# EAGLE board Panelizado_completo (EAGLE 9.6.2)
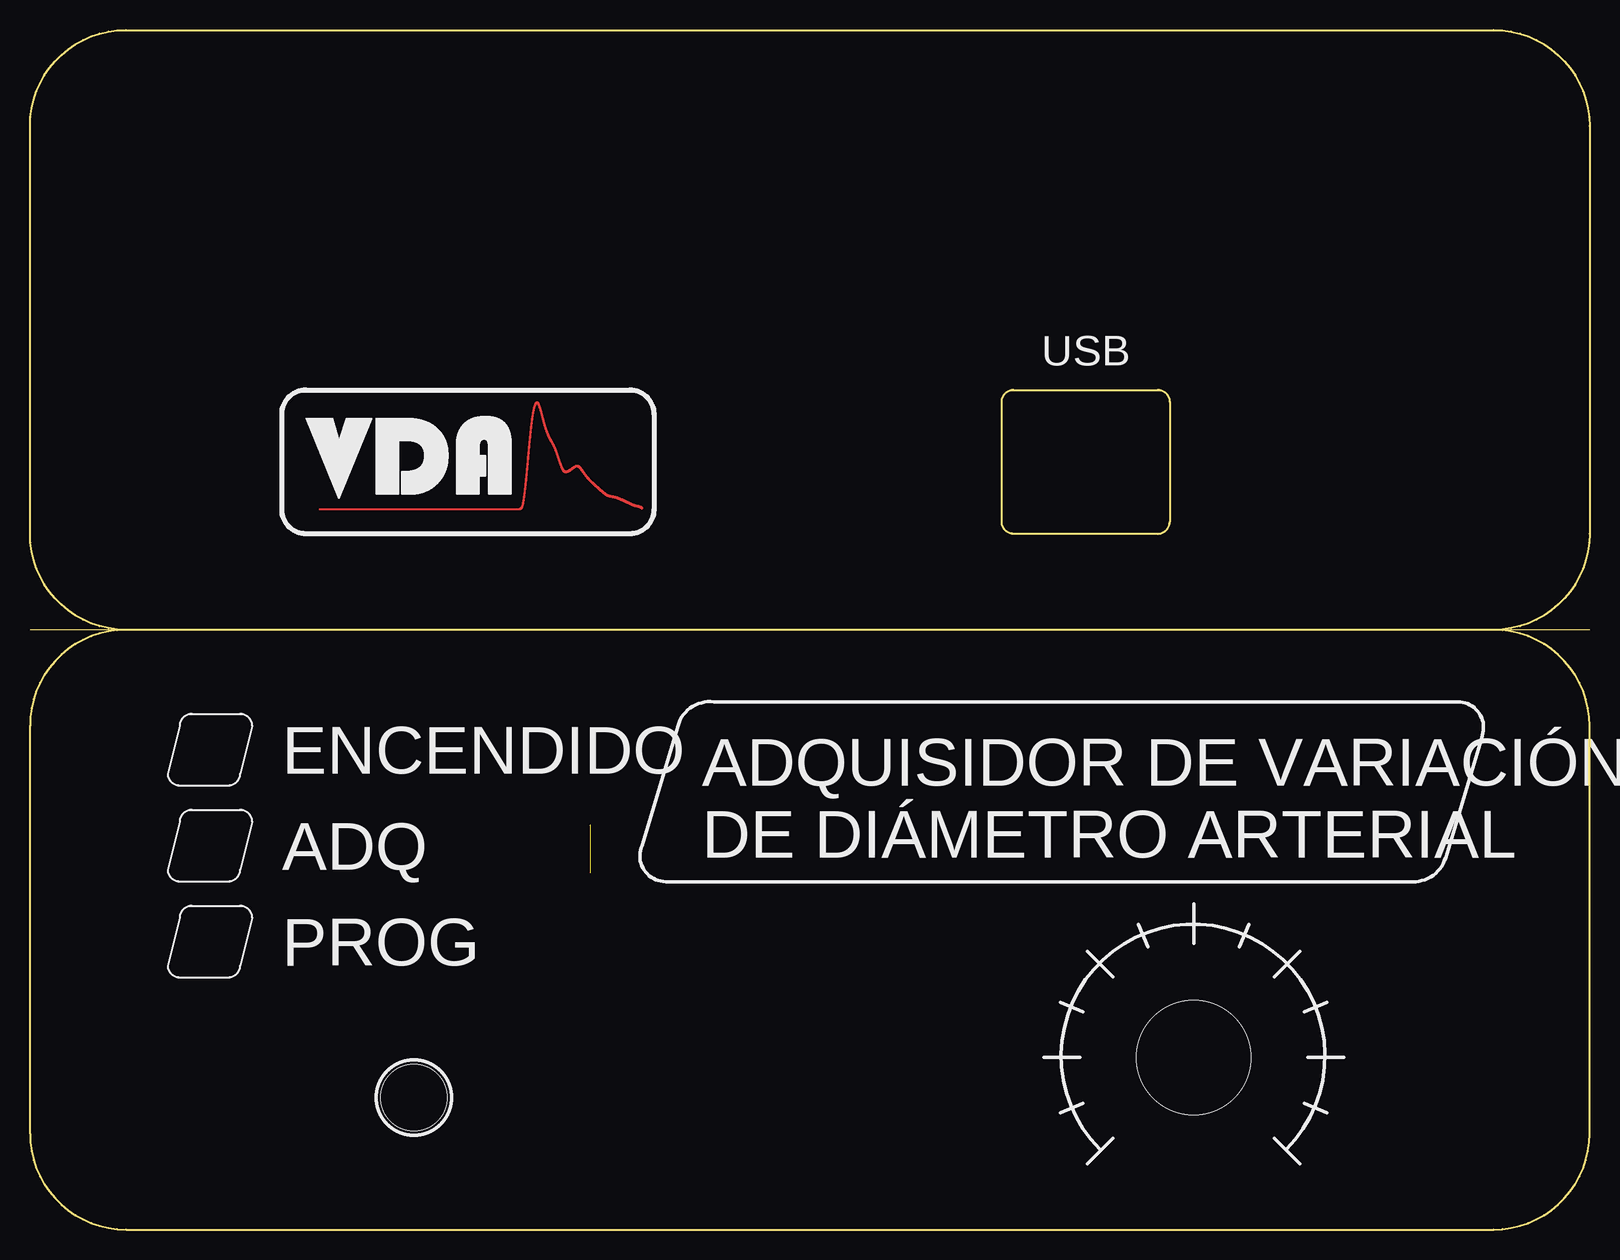
[diagram p0: board, top side]
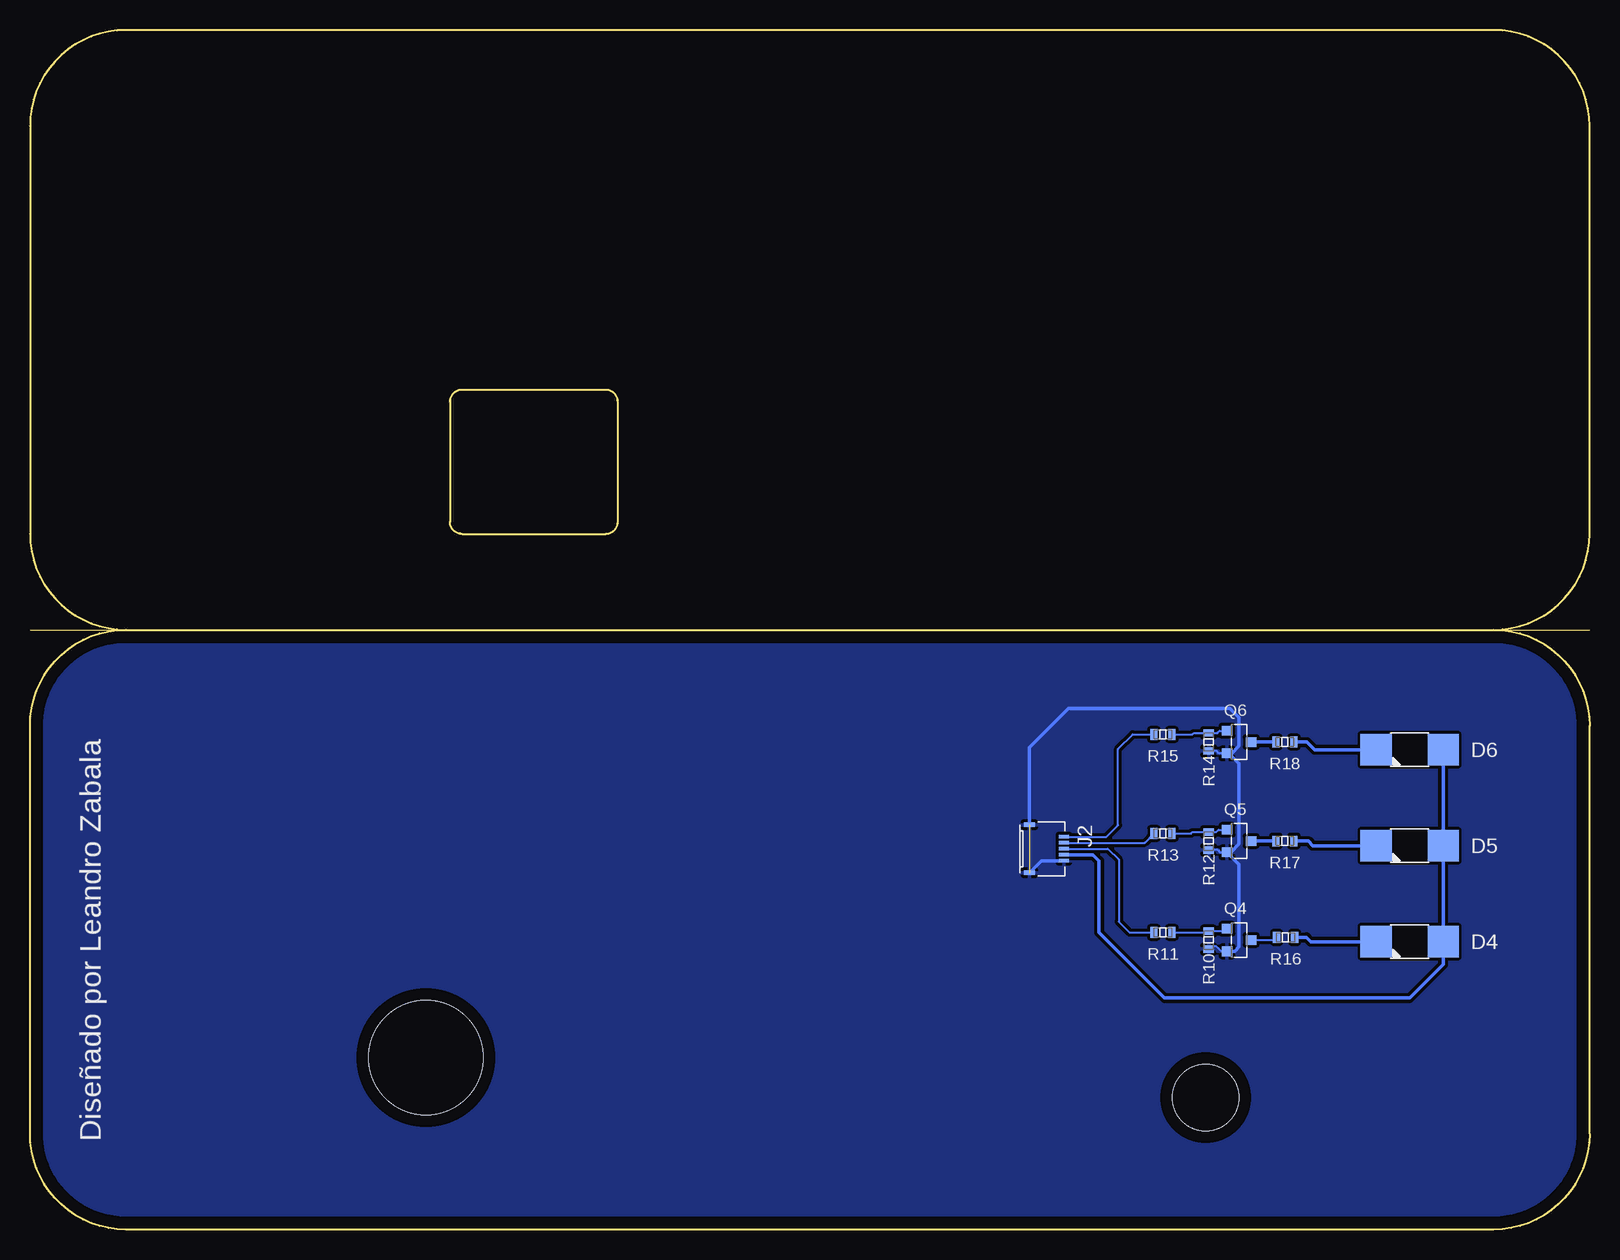
[diagram p1: board, bottom side, seen from below]

Size 130 x 100 mm. Coordinates in mm from the lower left corner, seen from the top.
Outline: 130,50 0,50
Outline: 8,50 arc90 0,42 0,8 arc90 8,0 122,0 arc90 130,8 130,42 arc90 122,50
Outline: 8,50 arc-90 0,58 0,92 arc-90 8,100 122,100 arc-90 130,92 130,58 arc-90 122,50
Outline: 122,50 8,50
Outline: 82,70 94,70 arc-90 95,69 95,59 arc-90 94,58 82,58 arc-90 81,59 81,69 arc-90 82,70
Copper layers (1*16): Top 0.035mm / dielectric 1.5mm / Bottom 0.035mm
Design rules "default": minimum track width 6mil, minimum drill 0.35mm, track to track 6mil, track to pad 6mil, pad to pad 6mil, via to via 6mil, smd to smd 6mil, copper to edge 40mil, drill to drill 6mil, minimum pad ring 10mil, minimum via ring 8mil, stop-mask expansion 4mil, vias tented up to drill 0mil, thermal gap 10mil
Holes 9.5 mm at 97,14.34
Holes 5.5 mm at 32,11

## Footprints (pad centres in the part's own frame; a part is rotated, then mirrored left to right if it is on the bottom)
VLRK31 = smd 2.6 x 2.6: A -2.8,0; K 2.8,0
F0504-H-05-10G-R = smd 0.3 x 0.85: P$1 -1,1.905; P$2 -0.5,1.905; P$3 0,1.905; P$4 0.5,1.905; P$5 1,1.905 | smd 0.4 x 0.95: P$7 -2,-0.97; P$8 2,-0.97
SOT-23 = smd 0.8 x 0.9: 1 -0.94,-1.003; 2 0.94,-1.003; 3 0,1.003
R_0603 = smd 0.61 x 0.889: 1 -0.749,0; 2 0.749,0

## Placement (x,y rotation side)
D4  LED-REVERSE_MOUNT  [VLRK31]  15,24 180 bottom
D5  LED-REVERSE_MOUNT  [VLRK31]  15,32 180 bottom
D6  LED-REVERSE_MOUNT  [VLRK31]  15,40 180 bottom
J2  F0504-H-05-10G-R  [F0504-H-05-10G-R]  45.72,31.75 270 bottom
Q4  BSS138  [SOT-23]  29.21,24.13 270 bottom
Q5  BSS138  [SOT-23]  29.21,32.38 270 bottom
Q6  BSS138  [SOT-23]  29.21,40.64 270 bottom
R10  100K  [R_0603]  31.75,24.13 90 bottom
R11  100R  [R_0603]  35.56,24.77 180 bottom
R12  100K  [R_0603]  31.75,32.38 90 bottom
R13  100R  [R_0603]  35.56,33.02 180 bottom
R14  100K  [R_0603]  31.75,40.64 90 bottom
R15  100R  [R_0603]  35.56,41.27 180 bottom
R16  100R  [R_0603]  25.34,24.36 180 bottom
R17  100R  [R_0603]  25.4,32.38 180 bottom
R18  100R  [R_0603]  25.4,40.64 180 bottom
U$1  LOGO_VDA-3CM  [LOGO_VDA-3CM]  23,60 0 top

## Library data of the parts
D4-D6 = property_LED
J2 = property-connectors
Q4-Q6 R10-R18 = Property-standar
U$1 = Frames

## Nets
+3V3: D4.A D5.A D6.A J2.P$4
GND: J2.P$5 J2.P$7 J2.P$8 Q4.2 Q5.2 Q6.2 R10.1 R12.1 R14.1
N$13: Q4.1 R10.2 R11.1
N$14: Q5.1 R12.2 R13.1
N$15: Q6.1 R14.2 R15.1
N$16: J2.P$3 R11.2
N$17: J2.P$2 R13.2
N$18: J2.P$1 R15.2
N$19: D4.K R16.1
N$20: Q4.3 R16.2
N$21: D5.K R17.1
N$22: Q5.3 R17.2
N$23: D6.K R18.1
N$24: Q6.3 R18.2

## Tracks (layer width: path | path; a pad name or v marks a point on that pad's centre or on a via)
+3V3
  Bottom 0.305: J2.P$4 41.41,31.25 40.89,30.73 40.89,24.77 35.43,19.3 14.99,19.3 12.2,22.09 D4.A D5.A D6.A
GND  (1 unrouted)
  Bottom 0.152: Q6.2 30.88,39.7 31.07,39.89 R14.1 | R12.1 30.99,31.64 30.8,31.45 Q5.2 | Q4.2 30.68,23.19 31.11,23.61 31.62,23.61 31.75,23.48 R10.1
  Bottom 0.305: J2.P$5 45.69,30.75 J2.P$8 | Q4.2 29.58,23.19 29.21,23.56 29.21,30.44 Q5.2 29.91,31.45 29.21,32.14 29.21,38.86 30.05,39.7 Q6.2 29.83,39.7 29.21,40.32 29.21,42.67 29.97,43.43 43.43,43.43 46.69,40.18 J2.P$7
  pour Bottom: 45.09,35.56 48.26,35.56 48.26,27.94 45.09,27.94
  pour Bottom (isolate 0.254): -0.64,50.8 -0.64,-0.64 130.81,-0.64 130.81,50.8
N$13
  Bottom 0.152: R11.1 31.86,24.77 R10.2 30.4,24.88 Q4.1
N$14
  Bottom 0.152: R13.1 33.21,33.02 33.09,33.13 R12.2 31.11,33.13 30.92,33.33 Q5.1
N$15
  Bottom 0.152: R15.1 33.11,41.27 33,41.39 R14.2 31.02,41.39 30.83,41.58 Q6.1
N$16
  Bottom 0.152: J2.P$3 40.16,31.75 39.24,30.83 39.24,25.65 38.35,24.77 R11.2
N$17
  Bottom 0.152: J2.P$2 37.08,32.25 R13.2
N$18
  Bottom 0.152: J2.P$1 40.26,32.75 39.31,33.7 39.31,40.05 38.08,41.27 R15.2
N$19
  Bottom 0.305: D4.K 23.23,24 23.59,24.36 R16.1
N$20
  Bottom 0.152: Q4.3 26.32,24.13 R16.2
N$21
  Bottom 0.305: R17.1 23.46,32.38 23.07,32 D5.K
N$22
  Bottom 0.305: Q5.3 R17.2
N$23
  Bottom 0.305: D6.K 22.91,40 23.55,40.64 R18.1
N$24
  Bottom 0.305: Q6.3 R18.2

## Text on the board
tPlace: USB | ENCENDIDO | ADQUISIDOR DE VARIACIÓN / DE DIÁMETRO ARTERIAL | ADQ | PROG
bPlace: Diseñado por Leandro Zabala
tDocu: V-SCORING